# Altium PCB dc_cdi_pcb_recovery.PcbDoc (part 2 of 2)
Units mm, origin at the board's own origin, x right, y up, seen from the top; angles counter-clockwise.
Board outline 152.4 x 101.6 mm, 2 copper layers (Top Layer, Bottom Layer); 123 components, 81 nets, 537 pads, 0 vias.
Unrouted connection lines stored in the file: 280.
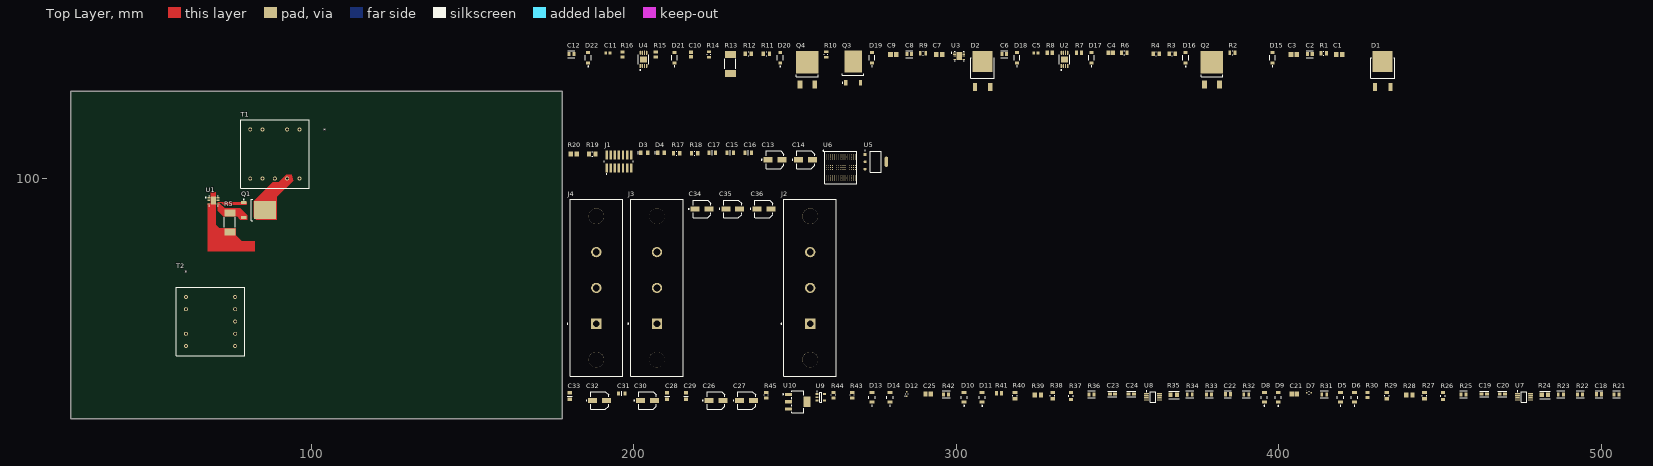
[diagram p0: Top Layer view]

## Part data (continued)
U6: library part CMP-0243-00109-2, "ARM Cortex-M4 32-bit MCU+FPU, 210 DMIPS, 2048 kB Flash, 256 kB Internal RAM, 140 I/Os, 176-pin UFBGA, -40 to 85 degC, Tray", I/Os (High Current)=140, Manufacturer=STMicroelectronics, Operating Frequency(F) (Processor speed) (MHz)=168, Supply Voltage(Vcc) max (V)=3.6, Supply Voltage(Vcc) min (V)=1.8, ComponentLink1Description="Manufacturer URL", ComponentLink1URL=http://www.st.com/web/en/home.html, ComponentLink2Description=Datasheet, ComponentLink2URL=http://www.st.com/st-web-ui/static/active/en/resource/technical/document/datasheet/DM00071990.pdf, ComponentLink3Description="Package Specification", ComponentLink3URL=http://www.st.com/st-web-ui/static/active/en/resource/technical/document/datasheet/DM00037051.pdf, Core="ARM Cortex-M4", D/A Converter=2x12-bit, DatasheetVersion="Rev. 1", FLASH Size (Prog) (kB)=2048, Internal RAM Size (kB)=256, Mounting Technology="Surface Mount", PackageDescription="176+25-Ball Ultra Thin Fine Pitch Ball Grid Array, 10 x 10 x 0.6 mm Body, 0.65 mm Pitch", PackageReference=UFBGA176+25, PackageVersion="Rev. 4, 06/2013", Packing=Tray, PartNumber=STM32F427IIH6
U7 U8: library part CMP-0384-01726-2, "Double Channel Rail-to-Rail Operational Amplifier, 200 KHz BW, 40 mV/us SR, Industrial, 8-pin SOP (RM-8), Tube", Amplifiers Per Package=2, Generic Part Number=ADA4051-2, Input Bias Current=20pA, Input Offset Voltage=2uV, Manufacturer="Analog Devices", Code_JEDEC=MO-187-AA, ComponentLink1Description="Manufacturer URL", ComponentLink1URL=http://www.analog.com/en/index.html, ComponentLink2Description=Datasheet, ComponentLink2URL=http://www.analog.com/static/imported-files/data_sheets/ADA4051-1_4051-2.pdf, ComponentLink3Description="Package Specification", ComponentLink3URL=http://www.analog.com/static/imported-files/packages/PKG_PDF/MSOP%28RM%29/RM_8.pdf, ComponentLink4Description="Reference Circuit", ComponentLink4URL=http://www.analog.com/en/all-operational-amplifiers-op-amps/operational-amplifiers-op-amps/ada4051-2/products/product.html#product-recommendations, DatasheetVersion="Rev. B", Iq/Amp=13uA, Mounting Technology="Surface Mount", PackageDescription="8-Pin Mini Small Outline Package, Body 3 x 3 mm, Pitch 0.65 mm", PackageReference=RM-8, PartNumber=ADA4051-2ARMZ, RevisionNote="Reference Circuit URL fixed", Slew Rate=40mV/us, Small Signal Bandwidth=200KHz, V Span Max=5.5V, V Span Min=1.8V
U9: library part CMP-0384-01443-3, "Single Channel RRIO Operational Amplifier, 80 MHz BW, 35 V/us SR, Industrial, 5-pin SOT23 (RJ-5), Reel", Amplifiers Per Package=1, Generic Part Number=AD8031, Input Bias Current=450nA, Input Offset Voltage=1mV, Manufacturer="Analog Devices", Code_JEDEC=MO-178-AA, ComponentLink1Description="Manufacturer URL", ComponentLink1URL=http://www.analog.com/en/index.html, ComponentLink2Description=Datasheet, ComponentLink2URL=http://www.analog.com/static/imported-files/data_sheets/AD8031_8032.pdf, ComponentLink3Description="Package Specification", ComponentLink3URL=http://www.analog.com/static/imported-files/packages/PKG_PDF/SOT-23(RJ)/RJ_5.pdf, ComponentLink4Description="Reference Circuit", ComponentLink4URL=http://www.analog.com/en/all-operational-amplifiers-op-amps/operational-amplifiers-op-amps/ad8031/products/product.html#product-recommendations, DatasheetVersion="Rev. D", Iq/Amp=900uA, Mounting Technology="Surface Mount", PackageDescription="5-Pin Small Outline Transistor Package, Body 2.9 x 1.6 mm, Pitch 0.95 mm", PackageReference=RJ-5, PackageVersion=121608-A, Packing=Reel, PartNumber=AD8031ARTZ-REEL7, RevisionNote="Reference Circuit URL fixed", Slew Rate=35V/us, Small Signal Bandwidth=80MHz, V Span Max=12V, V Span Min=2.7V
U10: library part CMP-04917-000007-1, "IC REG LINEAR 5V 1.5A SOT223-4", Dropout Voltage=2V, Manufacturer="Texas Instruments", Max Junction Temp=+150°C, Max Supply Voltage=30V, Min Supply Voltage=7.5V, Nominal Supply Current=8mA, Output Current=1.5A, Output Voltage=5V, Package=DCY0004A, Temperature="0°C to +125°C", Temperature Range High=+125°C, Temperature Range Low=0°C, Accuracy Percentage=3%, Automotive=No, Category=IC, ComponentLink2Description=Datasheet, ComponentLink2URL=http://www.ti.com/lit/ds/symlink/lm7800.pdf, Device Class L1="Integrated Circuits (ICs)", Device Class L2="Power Management ICs", Device Class L3="Voltage Regulators - Linear", Digikey Description="IC REG LINEAR 5V 1.5A SOT223-4", Height=1.8mm, Lead Free=Yes, Manufacturer Part Number=LM7805MP/NOPB, Number of Outputs=1, Octopart=https://octopart.com/lm7805mp%2Fnopb-texas+instruments-74629991, Output Type=Fixed, RoHS=TRUE, Standoff Height=0.02mm

## Nets (pads, with @x,y where several pads share a name; then routed paths per layer and width w, separated by ;. In a path a pad name is that pad's centre, name@x,y a point inside that pad or via, vN(x,y) a via of type N, cw(c..) or ccw(c..) an arc to the next point about the centre after c; other vN are vias at no path point)
+3V3: C14.2 C16.1 C17.1 J1.3 R19.2 U5.2 U5.4 U6.C5 U6.C7 U6.C8 U6.C9 U6.F3 U6.G3 U6.G13 U6.H13 U6.J12 U6.J13 U6.K4 U6.N8 U6.N9 U6.N10
+5: C30.2 C31.1 R44.2 U2.6 U4.6 U7.8 U8.8 U9.5 U10.3
GND: C1.1 C2.2 C4.1 C5.1 C6.2 C7.1 C8.2 C10.1 C11.1 C12.2 C13.1 C14.1 C15.2 C16.2 C17.2 C26.1 C27.1 C28.2 C29.2 C30.1 C31.2 C32.1 C33.2 C34.1 C35.1 C36.1 D3.1 D4.1 D8.1 D9.2 D13.1 D14.2 D18.2 D22.2 J1.5 J1.7 J2.2 J2.3 Q2.3 Q4.3 R3.1 R4.1 R5.1 R7.1 R11.1 R12.1 R13.1 R15.1 R20.1 R27.1 R38.1 R45.1 T1.4 T2.4 U1.5 U1.11 U3.5 U3.11 U5.1 U6.D5 U6.D7 U6.D8 U6.D9 U6.F2 U6.F6 U6.F7 U6.F8 U6.F9 U6.F10 U6.F12 U6.G2 U6.G6 U6.G7 U6.G8 U6.G9 U6.G10 U6.G12 U6.H6 U6.H7 U6.H8 U6.H9 U6.H10 U6.H12 U6.J6 U6.J7 U6.J8 U6.J9 U6.J10 U6.K6 U6.K7 U6.K8 U6.K9 U6.K10 U6.M1 U6.M8 U6.M9 U7.4 U8.4 U9.2 U10.2 U10.4
NetC1_2: C1.2 C7.2 C13.2 C15.1 C32.2 C33.1 J2.1 R1.2 R9.2 T1.7 T1.10 U1.8 U1.10 U3.8 U3.10 U5.3 U10.1
NetC2_1: C2.1 C3.1 D1.1 D1.3 D15.1 Q2.4 R2.2
NetC3_2: C3.2 J3.1
NetC4_2: C4.2 U1.3
NetC5_2: C5.2 R8.2 U1.1
NetC6_1: C6.1 R8.1
NetC8_1: C8.1 C9.1 D2.1 D2.3 D19.1 Q4.4 R10.2
NetC9_2: C9.2 J3.3
NetC10_2: C10.2 U3.3
NetC11_2: C11.2 R16.2 U3.1
NetC12_1: C12.1 R16.1
NetC18_1: C18.1 R29.1 R30.2
NetC18_2: C18.2 R26.1 R28.1 U7.7
NetC19_1: C19.1 R25.1 R27.2
NetC19_2: C19.2 C20.1 R23.1 R31.2
NetC20_2: C20.2 U7.3
NetC21_1: C21.1 C25.1 C27.2 C29.1 R21.2 R23.2 R24.2 R32.2 R34.2 R35.2 R43.1 U9.1
NetC21_2: C21.2 R29.2 U7.5
NetC22_1: C22.1 R40.1 R41.2
NetC22_2: C22.2 R37.1 R39.1 U8.7
NetC23_1: C23.1 R36.1 R38.2
NetC23_2: C23.2 C24.1 R34.1 R42.2
NetC24_2: C24.2 U8.3
NetC25_2: C25.2 R40.2 U8.5
NetC26_2: C26.2 C28.1 R44.1 R45.2 U9.3
NetC34_2: C34.2 C35.2 C36.2
NetD1_2: D1.2 T1.5
NetD2_2: D2.2 T2.5
NetD3_2: D3.2 R17.2
NetD4_2: D4.2 R18.2
NetD5_1: D5.1 D6.2 R28.2 U6.N3
NetD5_2: D5.2 D7.2 D8.2
NetD6_1: D6.1 D7.1 D9.1
NetD10_1: D10.1 D11.2 R39.2 U6.N2
NetD10_2: D10.2 D12.2 D13.2
NetD11_1: D11.1 D12.1 D14.1
NetD15_2: D15.2 D16.1
NetD16_2: D16.2 D17.1
NetD17_2: D17.2 D18.1
NetJ1_4: J1.4 U6.A15
NetJ1_6: J1.6 U6.A14
NetJ1_11: J1.11 R20.2
NetJ1_13: J1.13 U6.B5
NetJ1_14: J1.14 U6.B6
NetJ4_1: J4.1 R36.2
NetJ4_3: J4.3 R25.2
NetQ1_1: Q1.1 U1.7 | length 8
  Top Layer w0.254: U1.7 78.867,92.591 Q1.1
NetQ1_2: Q1.2 T1.6 T1.9
NetQ1_3: Q1.3 R5.2 U1.6
NetQ2_1: Q2.1 R6.1
NetQ3_1: Q3.1 U3.7
NetQ3_2: Q3.2 T2.6 T2.9
NetQ3_3: Q3.3 R13.2 U3.6
NetQ4_1: Q4.1 R14.1
NetR1_1: R1.1 R4.2 U1.9
NetR2_1: R2.1 R3.2 U1.2
NetR6_2: R6.2 U2.5
NetR7_2: R7.2 U1.4
NetR9_1: R9.1 R12.2 U3.9
NetR10_1: R10.1 R11.2 U3.2
NetR14_2: R14.2 U4.5
NetR15_2: R15.2 U3.4
NetR17_1: R17.1 U6.N14
NetR18_1: R18.1 U6.N15
NetR19_1: R19.1 U6.R1
NetR21_1: R21.1 R22.2 U7.2
NetR22_1: R22.1 R30.1 R31.1 U7.1
NetR24_1: R24.1 R26.2 U7.6
NetR32_1: R32.1 R33.2 U8.2
NetR33_1: R33.1 R41.1 R42.1 U8.1
NetR35_1: R35.1 R37.2 U8.6
NetR43_2: R43.2 U9.4
NetT2_7: T2.7 T2.10
NetU2_2: U2.2 U6.A10
NetU2_3: U2.3 U4.3
NetU2_4: U2.4 U4.4 U6.A13
NetU4_2: U4.2 U6.R5
NetU6_F15: U6.F15
pads on no net: D19.2 D20.1 D20.2 D21.1 D21.2 D22.1 J1.1 J1.2 J1.8 J1.9 J1.10 J1.12 J2. J3. J3.2 J4. J4.2 T1.1 T1.2 T1.8 T2.1 T2.2 T2.8 U2.1 U2.7 U2.8 U2.9 U4.1 U4.7 U4.8 U4.9 U6.A1 U6.A2 U6.A3 U6.A4 U6.A5 U6.A6 U6.A7 U6.A8 U6.A9 U6.A11 U6.A12 U6.B1 U6.B2 U6.B3 U6.B4 U6.B7 U6.B8 U6.B9 U6.B10 U6.B11 U6.B12 U6.B13 U6.B14 U6.B15 U6.C1 U6.C2 U6.C3 U6.C4 U6.C6 U6.C10 U6.C11 U6.C12 U6.C13 U6.C14 U6.C15 U6.D1 U6.D2 U6.D3 U6.D4 U6.D6 U6.D10 U6.D11 U6.D12 U6.D13 U6.D14 U6.D15 U6.E1 U6.E2 U6.E3 U6.E4 U6.E12 U6.E13 U6.E14 U6.E15 U6.F1 U6.F4 U6.F13 U6.F14 U6.G1 U6.G4 U6.G14 U6.G15 U6.H1 U6.H2 U6.H3 U6.H4 U6.H14 U6.H15 U6.J1 U6.J2 U6.J3 U6.J4 U6.J14 U6.J15 U6.K1 U6.K2 U6.K3 U6.K12 U6.K13 U6.K14 U6.K15 U6.L1 U6.L2 U6.L3 U6.L4 U6.L12 U6.L13 U6.L14 U6.L15 U6.M2 U6.M3 U6.M4 U6.M5 U6.M6 U6.M7 U6.M10 U6.M11 U6.M12 U6.M13 U6.M14 U6.M15 U6.N1 U6.N4 U6.N5 U6.N6 U6.N7 U6.N11 U6.N12 U6.N13 U6.P1 U6.P2 U6.P3 U6.P4 U6.P5 U6.P6 U6.P7 U6.P8 U6.P9 U6.P10 U6.P11 U6.P12 U6.P13 U6.P14 U6.P15 U6.R2 U6.R3 U6.R4 U6.R6 U6.R7 U6.R8 U6.R9 U6.R10 U6.R11 U6.R12 U6.R13 U6.R14 U6.R15

## Other copper
Top Layer:
  region net NetQ1_2: 82.169,92.964 88.011,98.806 89.916,98.806 92.202,101.092 93.825,101.092 94.328,99.281 89.281,94.234 89.281,87.249 82.931,87.249 82.169,88.011
  region net NetQ1_1: 72.644,91.821 79.756,91.821 79.883,91.948 79.883,92.583 71.882,92.583
  pour cut-out: 68.707,93.091 68.77,93.154 68.961,93.154
  region net GND: 70.358,85.598 71.374,84.582 76.581,84.582 76.581,82.296 78.359,80.518 82.423,80.518 82.423,77.343 82.296,77.47 67.818,77.47 67.818,92.202 68.834,92.329 68.834,95.631 70.231,95.631 70.358,95.758 70.358,91.313
  region net NetQ1_3: 72.771,88.138 72.898,88.265 76.962,88.265 77.978,87.249 80.137,87.249 80.137,88.519 77.978,90.678 73.152,90.678 71.628,92.202 70.866,92.202 70.866,90.043
  pour cut-out: 70.612,92.075 71.501,91.186

## Text inside footprints (layer, text, board x,y; h text height)
T1: Top Overlay "*" at 103.296,115.506 h1.27 r270; Mechanical 13 "*" at 97.536,115.506 h1.27 r270
T2: Top Overlay "*" at 60.77,70.276 h1.27; Mechanical 13 "*" at 60.77,64.516 h1.27